# Altium PCB bottom_plate.PcbDoc
Units mm, origin at the board's own origin, x right, y up, seen from the top; angles counter-clockwise.
Board outline 381 x 123 mm, 2 copper layers (F.Cu, B.Cu); 17 components, 0 nets, 17 pads, 0 vias.
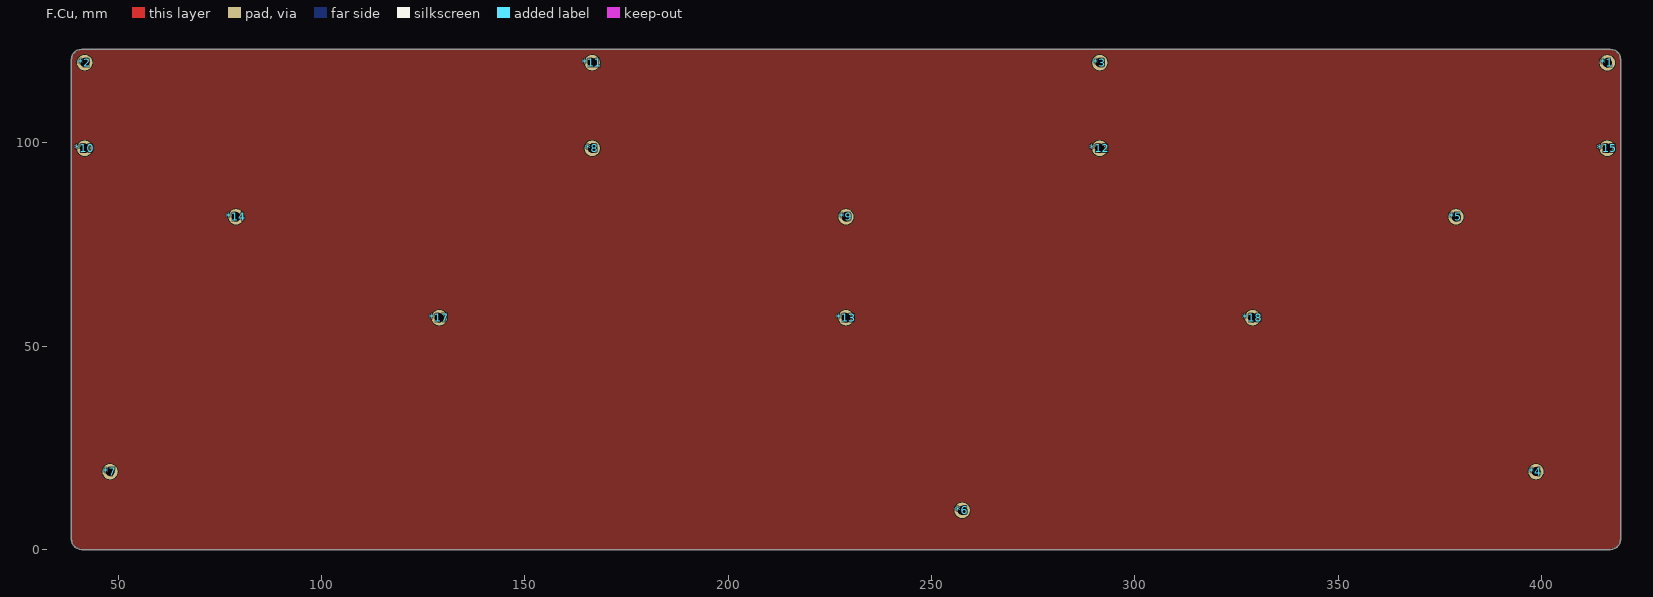
[diagram p0: F.Cu view]
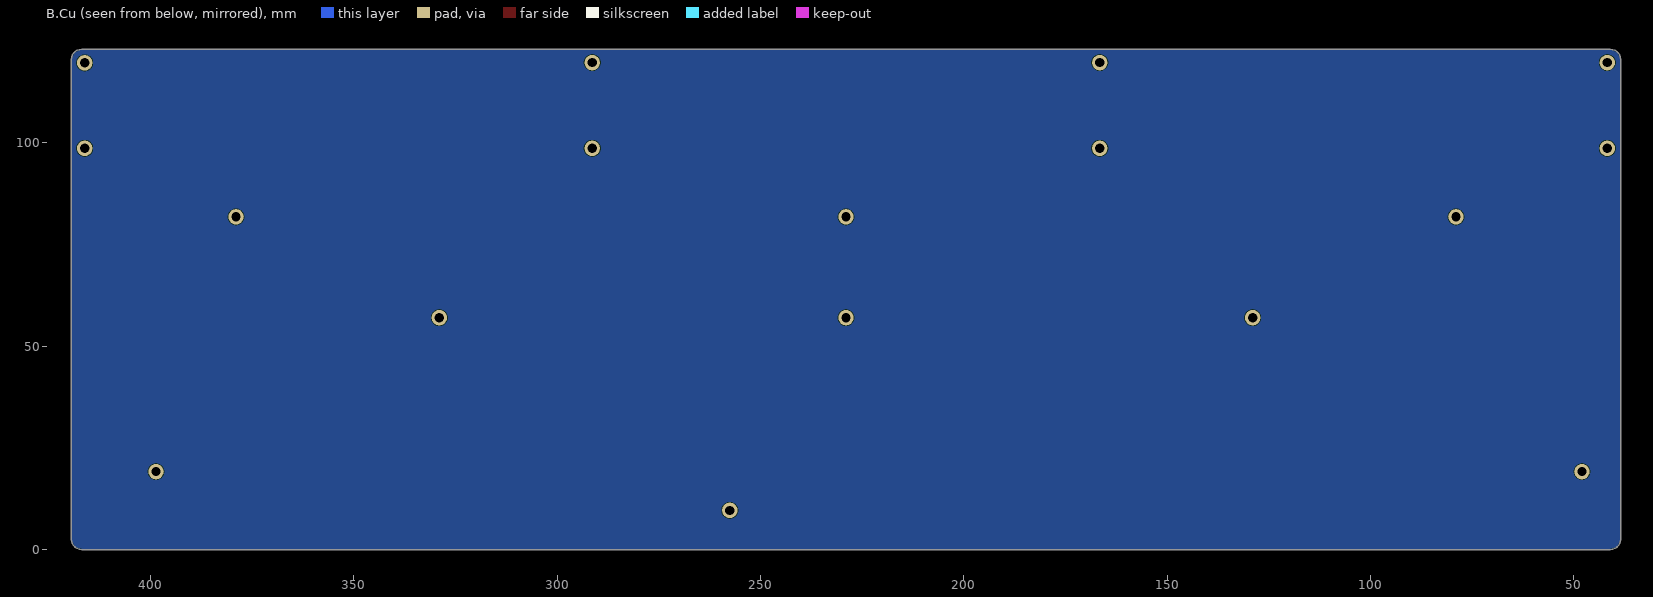
[diagram p1: B.Cu view, seen from below]

## Layer stack, top to bottom
F.Mask: solder mask 0.0102, Solder Resist, Dk 3.5
F.Cu: signal copper 0.0356
Dielectric 1: dielectric 0.32, FR-4, Dk 4.8
B.Cu: signal copper 0.0356
B.Mask: solder mask 0.0102, Solder Resist, Dk 3.5

## Board outline
416.941,0.025 417.506,0.089 418.043,0.277 418.525,0.58 418.927,0.982 419.229,1.463 419.417,2 419.481,2.565 419.481,96.418 419.481,100.736 419.481,120.485 419.417,121.05 419.229,121.587 418.927,122.069 418.525,122.471 418.043,122.773 417.506,122.961 416.941,123.025 290.957,123.025 290.195,123.025 207.645,123.025 137.35,123.025 71.628,123.025 41.021,123.025 40.456,122.961 39.919,122.773 39.437,122.471 39.035,122.069 38.733,121.587 38.545,121.05 38.481,120.485 38.481,96.863 38.481,2.565 38.545,2 38.733,1.463 39.035,0.982 39.437,0.58 39.919,0.277 40.456,0.089 41.021,0.025 62.23,0.025 354.965,0.025

## Design rules (kind name [scope] priority, off if disabled: settings)
BoardOutlineClearance [All] p1: gap=0.2 ignorepadtopadclearanceinfootprint=FALSE
Clearance [All] p1: gap=0.127 ignorepadtopadclearanceinfootprint=FALSE except(0.198: Arc-Hole Track-Hole; 0.25: SMDPad-Hole THPad-Hole Via-Hole Fill-Hole Poly-Hole Region-Hole Text-Hole)
ComponentClearance [All] p1: gap=0.127 collisioncheckmode=3 verticalgap=0.127 showdistances=TRUE
DiffPairsRouting [All] p1: maxlimit=0.254 minlimit=0.127 mostfreqgap=0.127 toplayer_minwidth=0.127 toplayer_maxwidth=25.4 toplayer_prefwidth=0.127 bottomlayer_minwidth=0.127 bottomlayer_maxwidth=25.4 bottomlayer_prefwidth=0.127 maxuncoupledlength=12.7
Height [All] p1: minheight=0 maxheight=1816.048 prefheight=12.7
HoleSize [All] p1: absolutevalues=TRUE maxlimit=6.3 minlimit=0.3 maxpercent=80.000 minpercent=20.000
HoleToHoleClearance [All] p1: gap=0.25 allowstackedmicrovias=FALSE
MinimumAnnularRing [All] p1: minimumring=0.076
MinimumSolderMaskSliver [All] p1: minsoldermaskwidth=0
PlaneClearance [All] p1: clearance=0.127
PlaneConnect PlaneConnectPowerPads [InPadClass('PowerPads')] p1: planeconnectstyle=Direct reliefexpansion=0.508 reliefentries=4 reliefconductorwidth=0.254 reliefairgap=0.254
PlaneConnect [All] p2: pad.planeconnectstyle=Relief pad.reliefexpansion=0.3 pad.reliefentries=4 pad.reliefconductorwidth=0.127 pad.reliefairgap=0.127 via.planeconnectstyle=Direct via.reliefexpansion=0.3 via.reliefentries=4 via.reliefconductorwidth=0.127 via.reliefairgap=0.127
PolygonConnect PolygonConnectPowerPads [All vs (InPadClass('PowerPads'))] p1: connectstyle=Direct reliefconductorwidth=0.254 reliefentries=4 polygonreliefangle="90 Angle" airgapwidth=0.254
PolygonConnect [All] p2: thpad.connectstyle=Relief thpad.reliefconductorwidth=0.127 thpad.reliefentries=4 thpad.polygonreliefangle="90 Angle" thpad.airgapwidth=0.127 smdpad.connectstyle=Relief smdpad.reliefconductorwidth=0.127 smdpad.reliefentries=4 smdpad.polygonreliefangle="90 Angle" smdpad.airgapwidth=0.127 via.connectstyle=Direct via.reliefconductorwidth=0.127 via.reliefentries=4 via.polygonreliefangle="90 Angle" via.airgapwidth=0.127
RoomDefinition bottom_plate [InComponentClass('bottom_plate')] p1: confinementstyle=ConfineIn formatcopy=TRUE lockcomponents=FALSE outline 420.624,1.524 507.746,1.524 507.746,57.658 420.624,57.658
RoutingCorners [All] p1: cornerstyle=Round minsetback=25.4 maxsetback=25.4
RoutingVias [All] p1: holewidth=0.3 width=0.6 viastyle="Through Hole" minholewidth=0.3 minwidth=0.6 maxholewidth=0.6 maxwidth=6.6
SilkToSilkClearance [All] p1: silktosilkclearance=0
SilkToSolderMaskClearance [IsPad] p1: minsilkscreentomaskgap=0.127 clearancetoexposedcopper=TRUE
SolderMaskExpansion [All] p1: expansion=0.075 istentingtop=FALSE
Width [All] p1: maxlimit=0.381 minlimit=0.203 preferedwidth=0.254 minimp=50.000000 maximp=50.000000 favimp=50.000000
19 further rules are at their usual default settings.

## Components (designator, comment, footprint, x,y, rotation, side; value= is the part's Value field where it differs from the comment)
*1 "Component_1" M2_Mounting_hole#1 416.179,119.697 r0 top
*2 "Component_1" M2_Mounting_hole#2 1.143,119.761 r0 top
*3 "Component_1" M2_Mounting_hole#3 125.942,119.761 r0 top
*4 "Component_1" M2_Mounting_hole#1 398.653,19.177 r0 top
*5 "Component_1" M2_Mounting_hole#1 378.981,81.827 r0 top
*6 "Component_1" M2_Mounting_hole#1 257.556,9.652 r0 top
*7 "Component_1" M2_Mounting_hole#1 48.006,19.177 r0 top
*8 "Component_1" M2_Mounting_hole#1 166.582,98.679 r0 top
*9 "Component_1" M2_Mounting_hole#1 228.981,81.827 r0 top
*10 "Component_1" M2_Mounting_hole#1 41.783,98.679 r0 top
*11 "Component_1" M2_Mounting_hole#4 41.783,119.761 r0 top
*12 "Component_1" M2_Mounting_hole#5 41.783,98.679 r0 top
*13 "Component_1" M2_Mounting_hole#1 228.981,57.023 r0 top
*14 "Component_1" M2_Mounting_hole#6 -30.379,81.827 r0 top
*15 "Component_1" M2_Mounting_hole#1 416.179,98.679 r0 top
*17 "Component_1" M2_Mounting_hole#1 128.981,57.023 r0 top
*18 "Component_1" M2_Mounting_hole#1 328.981,57.023 r0 top

## Footprints (in the part's own frame and the unit in brackets; to place one, negate y for a bottom-side part, rotate by r counter-clockwise, add the part's x,y. Pads: shape width x height; smd on the part's side, far side on the other; paste and mask are expansions set on the pad)
M2_Mounting_hole#1 [mil]
  round 150 hole 89: "M2 Hole"(0,0)
M2_Mounting_hole#2 [mil]
  round 150 hole 89: "M2 Hole"(1600,0)
M2_Mounting_hole#3 [mil]
  round 150 hole 89: "M2 Hole"(6513.33,0)
M2_Mounting_hole#4 [mil]
  round 150 hole 89: "M2 Hole"(4913.33,0)
M2_Mounting_hole#5 [mil]
  round 150 hole 89: "M2 Hole"(9826.65,0)
M2_Mounting_hole#6 [mil]
  round 150 hole 89: "M2 Hole"(4305.51,0)

## Nets (pads, with @x,y where several pads share a name; then routed paths per layer and width w, separated by ;. In a path a pad name is that pad's centre, name@x,y a point inside that pad or via, vN(x,y) a via of type N, cw(c..) or ccw(c..) an arc to the next point about the centre after c; other vN are vias at no path point)
pads on no net: "*1.M2 Hole" "*2.M2 Hole" "*3.M2 Hole" "*4.M2 Hole" "*5.M2 Hole" "*6.M2 Hole" "*7.M2 Hole" "*8.M2 Hole" "*9.M2 Hole" "*10.M2 Hole" "*11.M2 Hole" "*12.M2 Hole" "*13.M2 Hole" "*14.M2 Hole" "*15.M2 Hole" "*17.M2 Hole" "*18.M2 Hole"

## Polygon pours and split planes (outlines as drawn)
no net on F.Cu "NONET_L01_P001" (solid, pour order 1): 35.995,131.826 35.995,0.127 428.933,0.127 455.095,26.289 455.095,148.336
no net on B.Cu "NONET_L02_P000" (solid, pour order 0): 33.909,131.699 33.909,0 426.847,0 453.009,26.162 453.009,148.209

## Silkscreen, mask and mechanical layers (free items; w line width, h text height)
F.Mask:
  text "Designed By Ella / rev4 / 2021-2022" at 43.307,0.127 h1.52
Drill Drawing:
  lines w0.013: 40.683,97.579 42.883,99.779 ; 40.683,99.779 42.883,97.579 ; 40.683,118.661 42.883,120.861 ; 40.683,120.861 42.883,118.661 ; 415.079,97.579 417.279,99.779 ; 415.079,99.779 417.279,97.579 ; 415.079,118.597 417.279,120.798 ; 415.079,120.798 417.279,118.597